# EAGLE board light_triggger (EAGLE 6.4)

Size 100 x 80 mm. Coordinates in mm from the lower left corner, seen from the top.
Outline: 0,0 100,0 100,80 0,80 0,0
Copper layers (1*16): Top 0.035mm / dielectric 1.5mm / Bottom 0.035mm
Design rules "default": minimum track width 10mil, minimum drill 24mil, track to track 8mil, track to pad 8mil, pad to pad 8mil, via to via 8mil, smd to smd 8mil, copper to edge 40mil, drill to drill 8mil, minimum pad ring 10mil, minimum via ring 8mil, stop-mask expansion 4mil, vias tented up to drill 0mil, thermal gap 10mil

## Footprints (pad centres in the part's own frame; a part is rotated, then mirrored left to right if it is on the bottom)
C0603K = smd 1.05 x 1.08: 1 -0.875,0; 2 0.875,0
2X03 = drill 1.016 octagon: 1 -2.54,-1.27; 2 -2.54,1.27; 3 0,-1.27; 4 0,1.27; 5 2.54,-1.27; 6 2.54,1.27
LED5MM = drill 0.813 octagon: A -1.27,0; K 1.27,0
R0603 = smd 1 x 1.1: 1 -0.85,0; 2 0.85,0
B3F-10XX = drill 1.016 long: 1 -3.251,2.261; 2 3.251,2.261; 3 -3.251,-2.261; 4 3.251,-2.261
SOIC127P600X175-14N = smd 1.981 x 0.559: 1 -2.464,3.81; 2 -2.464,2.54; 3 -2.464,1.27; 4 -2.464,0; 5 -2.464,-1.27; 6 -2.464,-2.54; 7 -2.464,-3.81; 8 2.464,-3.81; 9 2.464,-2.54; 10 2.464,-1.27; 11 2.464,0; 12 2.464,1.27; 13 2.464,2.54; 14 2.464,3.81

## Placement (x,y rotation side)
C1  [C0603K]  -15.24,38.1 0 top  (outside the outline)
C2  [C0603K]  -19.05,38.1 0 top  (outside the outline)
JP1  [2X03]  -17.78,31.75 0 top  (outside the outline)
LED1  [LED5MM]  -30.48,31.75 0 top  (outside the outline)
R1  [R0603]  -36.83,30.48 0 top  (outside the outline)
R2  [R0603]  -40.64,30.48 0 top  (outside the outline)
S1  [B3F-10XX]  -19.05,22.86 0 top  (outside the outline)
S2  [B3F-10XX]  -30.48,22.86 0 top  (outside the outline)
U1  ATTINY24-20SSU  [SOIC127P600X175-14N]  -35.56,8.89 0 top  (outside the outline)

## Library data of the parts
C1 C2 R1 R2 = resistor
JP1 = pinhead
LED1 = led
S1 S2 = switch-omron; MPN: B3F-1000; OC_FARNELL: 176432; OC_NEWARK: 36M3542
U1 = Atmel_By_element14_Batch_1; MPN: ATTINY24-20SSU; OC_FARNELL: 1455137; OC_NEWARK: 58M3775; PACKAGE: SOIC-14; SUPPLIER: Atmel

## Nets
GND: C1.2 C2.2 JP1.6 S1.1 S1.2 S2.1 S2.2 U1.14
MISO: JP1.1 U1.5
MOSI: JP1.4 LED1.A U1.3
N$2: LED1.K U1.8
N$5: C2.1 R2.1 S2.3 S2.4 U1.7
RST: JP1.5 U1.4
SCK: C1.1 JP1.3 R1.1 S1.3 S1.4 U1.6
VCC: JP1.2 R1.2 R2.2 U1.1

## Tracks (layer width: path | path; a pad name or v marks a point on that pad's centre or on a via)
GND  (7 unrouted)
MISO  (1 unrouted)
MOSI  (2 unrouted)
N$2  (1 unrouted)
N$5  (4 unrouted)
RST  (1 unrouted)
SCK  (5 unrouted)
VCC  (3 unrouted)